# Altium PCB mchf_pro_rf.PcbDoc (part 1 of 3)
Units mil, origin at the board's own origin, x right, y up, seen from the top; angles counter-clockwise.
Board outline 7874.02 x 5512.23 mil, 2 copper layers (Top Layer, Bottom Layer); 347 components, 225 nets, 1009 pads, 443 vias.
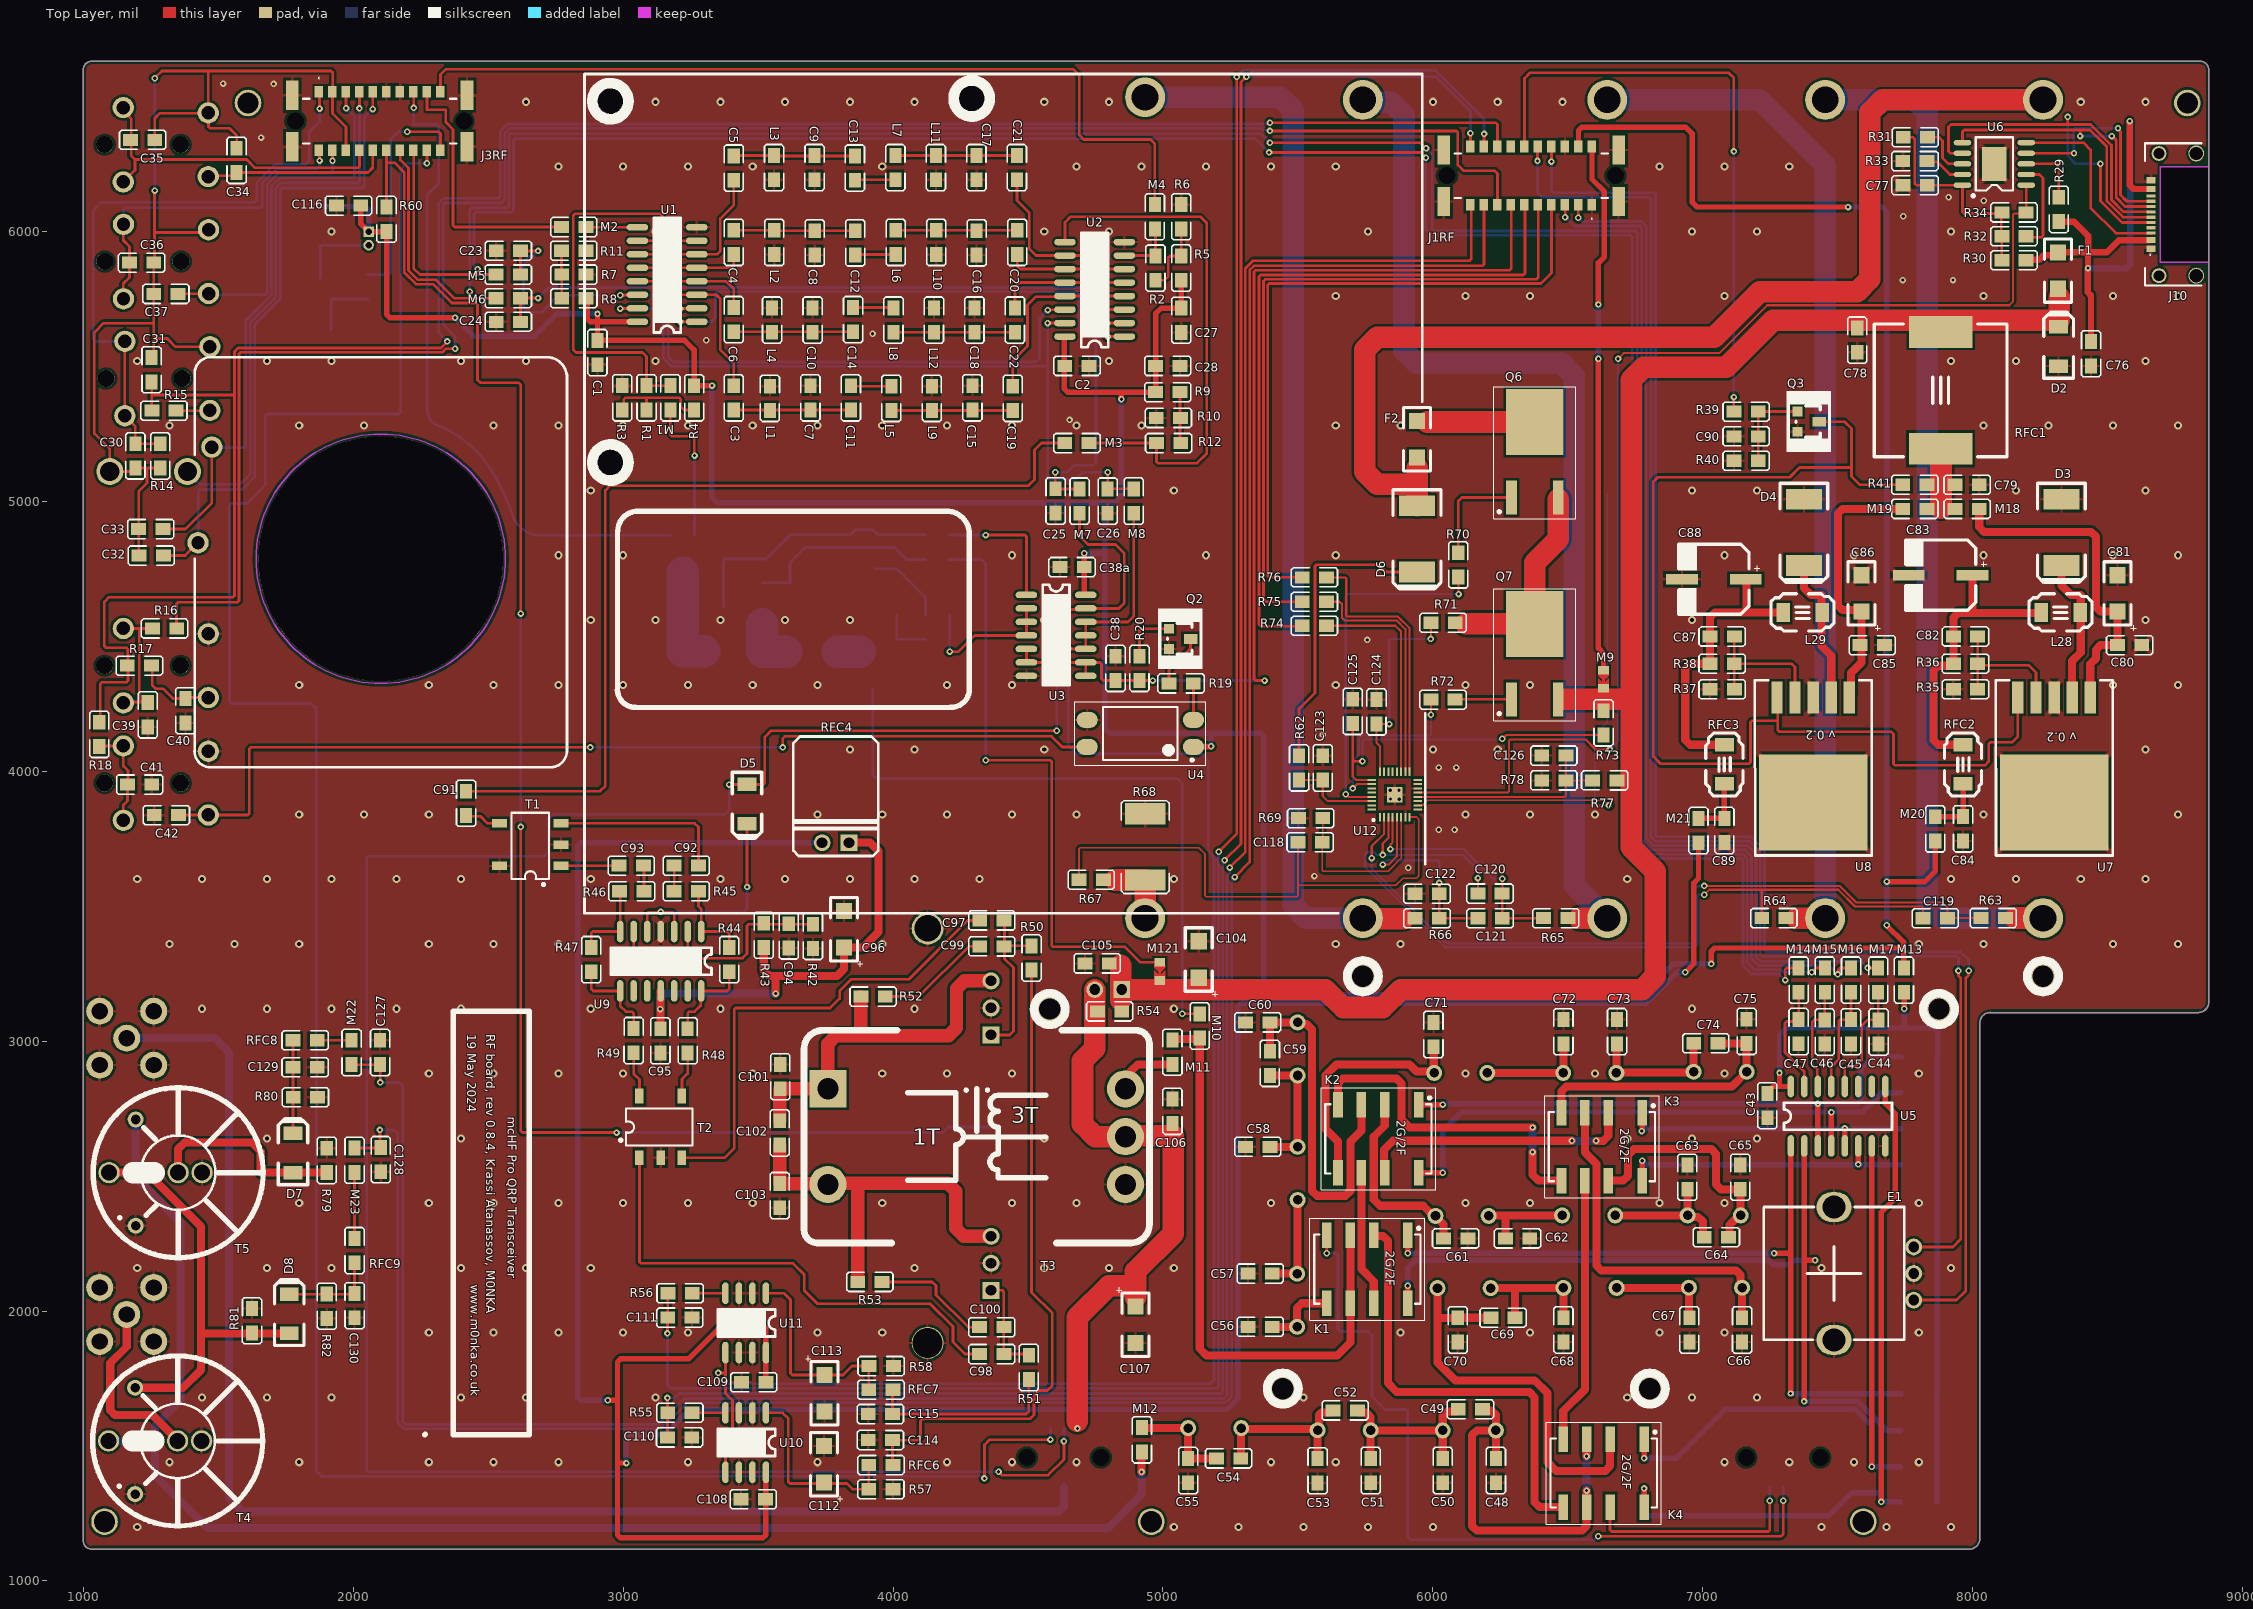
[diagram p0: Top Layer view]
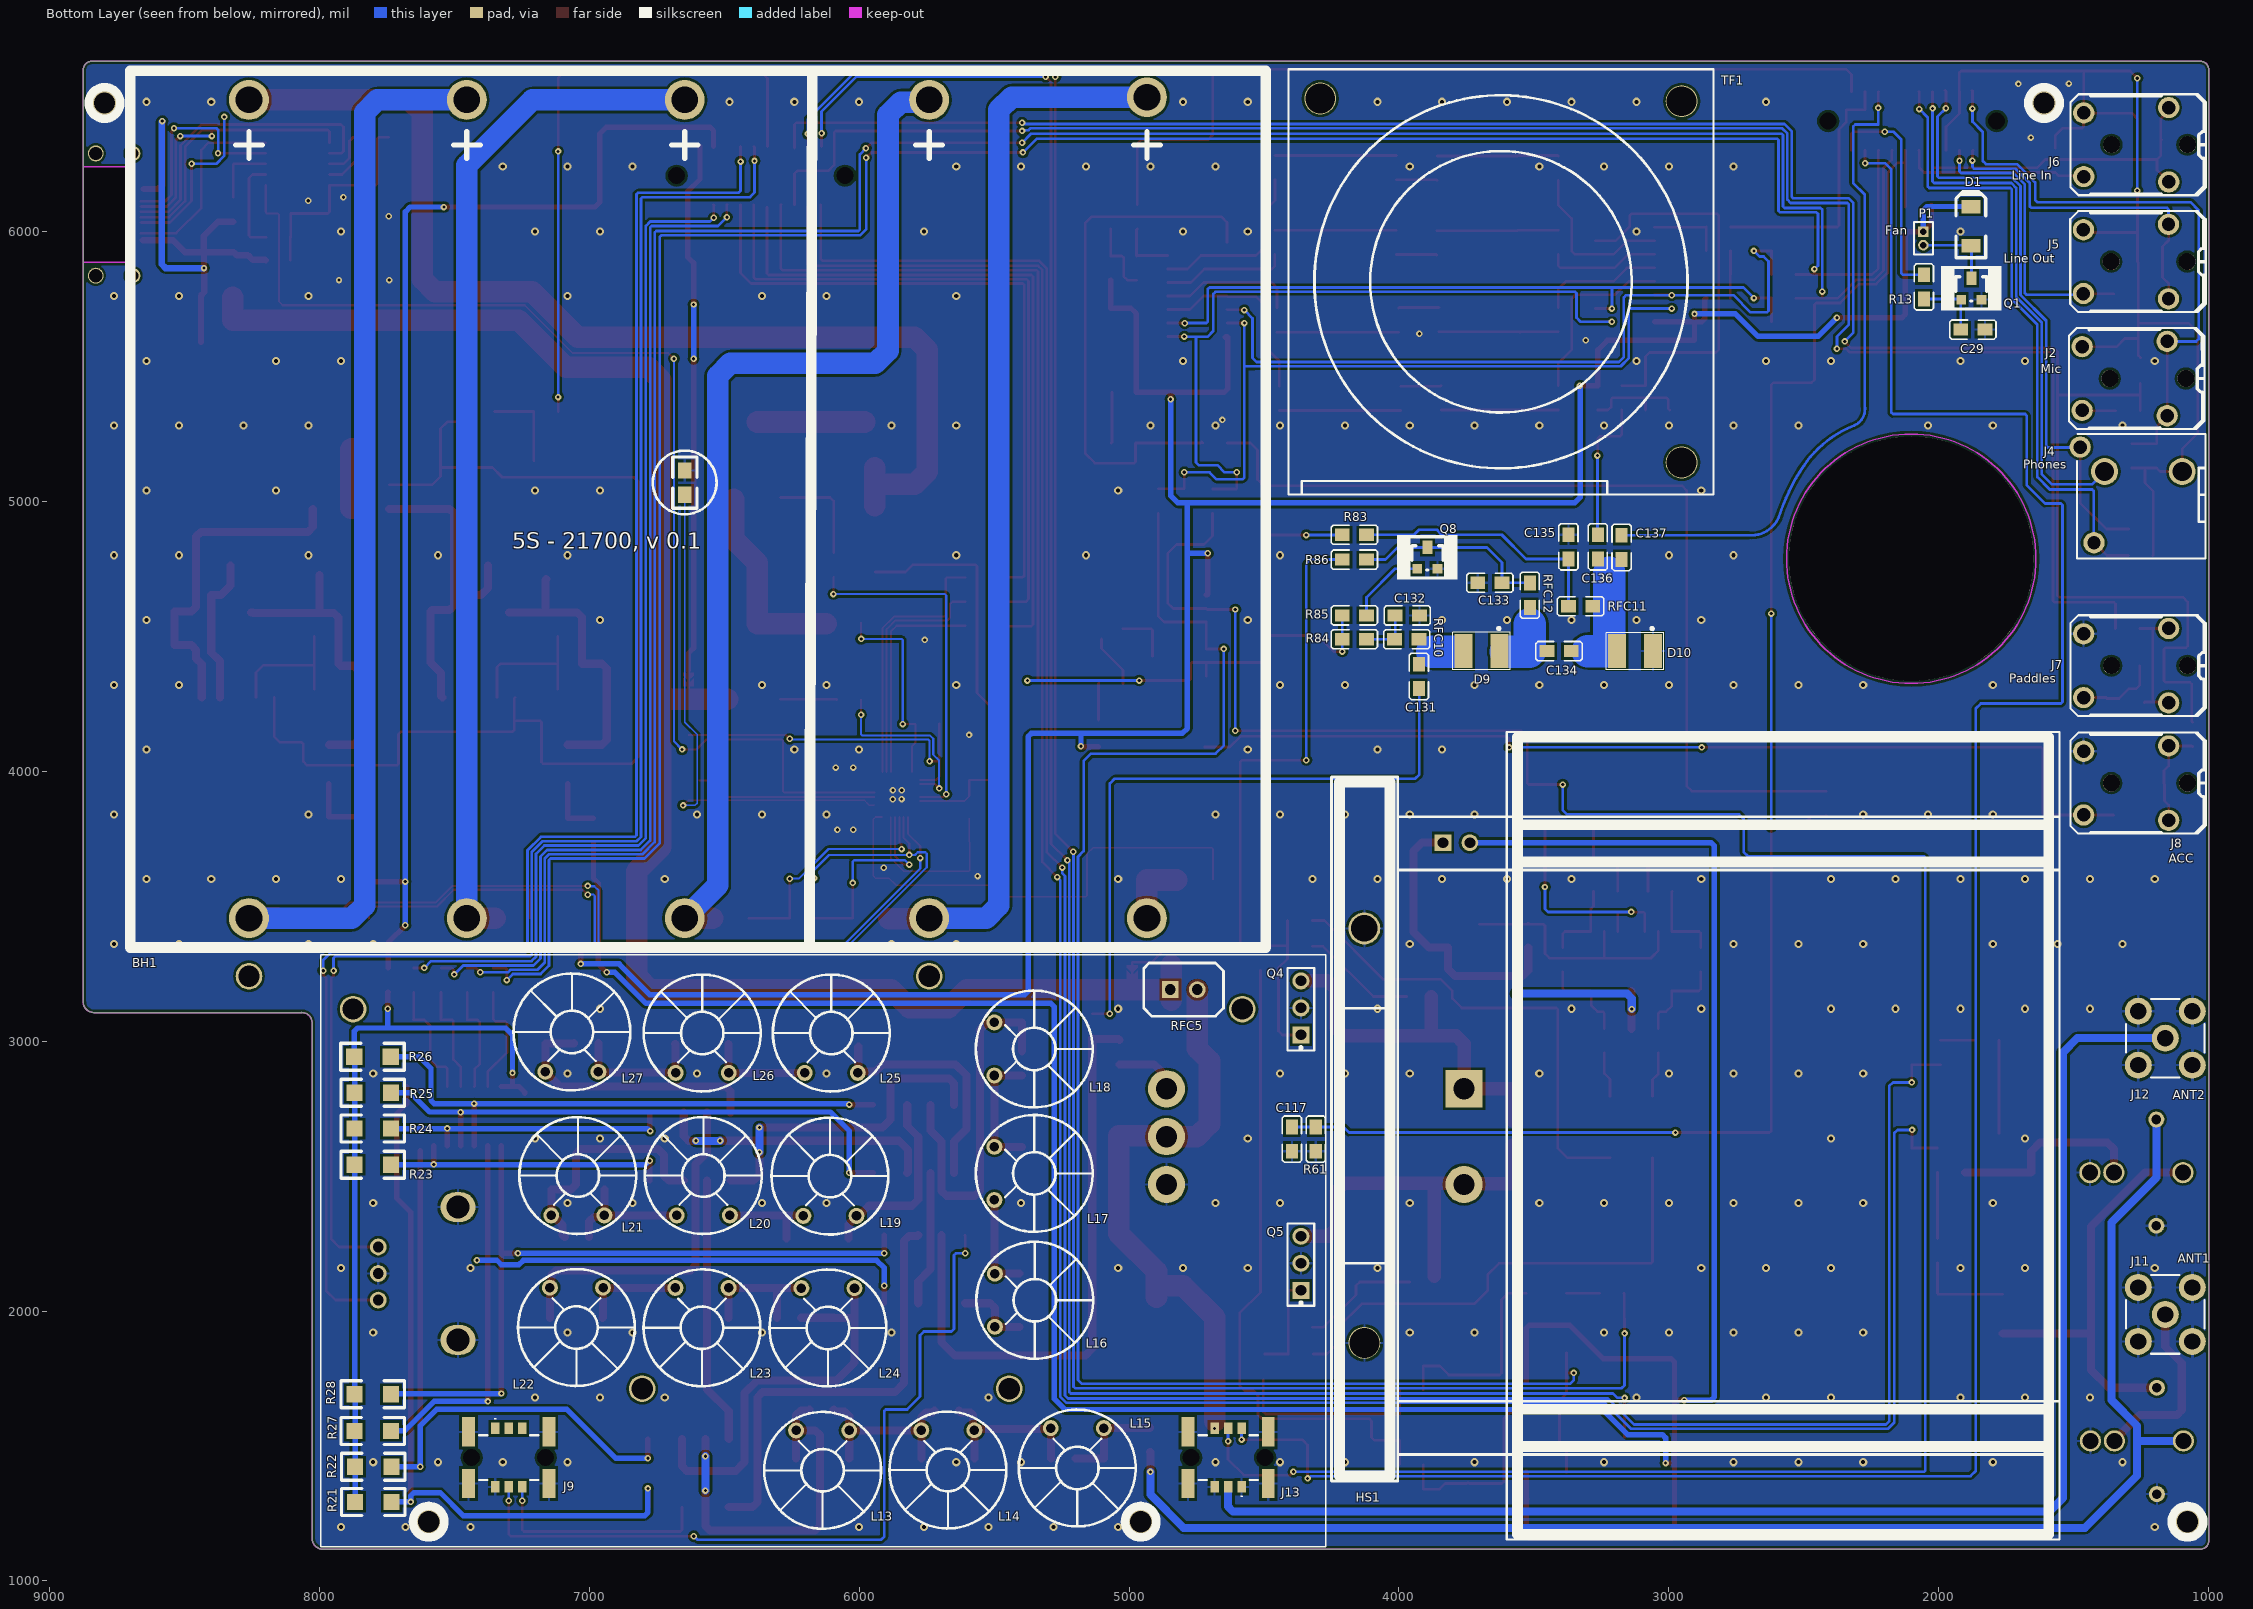
[diagram p1: Bottom Layer view, seen from below]

## Layer stack, top to bottom
Top Solder: solder mask 0.4, Solder Resist, Dk 3.5
Top Layer: signal copper 1.4
Dielectric 1: dielectric 12.6, FR-4, Dk 4.8
Bottom Layer: signal copper 1.4
Bottom Solder: solder mask 0.4, Solder Resist, Dk 3.5

## Board outline
1031.03,1117.97 cw(c1031.03,1149) 1000,1149 1000,6599 cw(c1031.03,6599) 1031.03,6630.03 8842.98,6630.03 cw(c8842.98,6599) 8874.02,6599 8874.01,3144.19 8873.96,3144.19 cw(c8835.09,3144.68) 8834.59,3105.81 8834.85,3105.89 8064.8,3105.89 8065.29,3106.11 ccw(c8064.8,3067.67) 8026.36,3068.16 8026.36,3068.7 8026.36,1157.23 8025.96,1156.19 cw(c7987.09,1156.68) 7986.59,1117.81 7986.59,1118

## Design rules (kind name [scope] priority, off if disabled: settings)
Clearance Clearance_1 [InPolygon] p1: gap=9 ignorepadtopadclearanceinfootprint=FALSE except(0: Arc-Hole Track-Hole SMDPad-Hole THPad-Hole Via-Hole Fill-Hole Poly-Hole Region-Hole Text-Hole)
Clearance [All] p2: gap=6 ignorepadtopadclearanceinfootprint=FALSE except(0: Arc-Hole Track-Hole SMDPad-Hole THPad-Hole Via-Hole Fill-Hole Poly-Hole Region-Hole Text-Hole)
DiffPairsRouting [All] p1: maxlimit=300 minlimit=6 mostfreqgap=6 toplayer_minwidth=6 toplayer_maxwidth=6 toplayer_prefwidth=6 bottomlayer_minwidth=6 bottomlayer_maxwidth=6 bottomlayer_prefwidth=6 maxuncoupledlength=150
HoleSize [All] p1: absolutevalues=TRUE maxlimit=1000 minlimit=1 maxpercent=80.000 minpercent=20.000
PolygonConnect PolygonConnect_vias [IsVia] p1: connectstyle=Direct reliefconductorwidth=10 reliefentries=4 polygonreliefangle="90 Angle" airgapwidth=10
PolygonConnect PolygonConnect_J1 [InComponent('J1')] p2: connectstyle=Relief reliefconductorwidth=50 reliefentries=4 polygonreliefangle="90 Angle" airgapwidth=10
PolygonConnect PolygonConnect_AluCap [InComponent('C74') OR InComponent('C77') OR InComponent('C80') OR InComponent('C83') OR InComponent('C86') OR InComponent('C89') OR InComponent('C147') OR InComponent('C150') OR InComponent('U6')  OR InComponent('U7') OR InComponent('U8') OR InComponent('U9')] p3: connectstyle=Relief reliefconductorwidth=20 reliefentries=4 polygonreliefangle="45 Angle" airgapwidth=10
PolygonConnect PolygonConnect_P2 [InComponent('P2')] p4: connectstyle=Relief reliefconductorwidth=30 reliefentries=4 polygonreliefangle="90 Angle" airgapwidth=10
PolygonConnect [All] p5: connectstyle=Relief reliefconductorwidth=10 reliefentries=4 polygonreliefangle="90 Angle" airgapwidth=10
RoomDefinition "Bandpass filters" [InComponentClass('Bandpass filters')] p1: confinementstyle=ConfineIn formatcopy=TRUE lockcomponents=FALSE outline 5173,4854 5173,6414 2414.01,6414 2414.01,4854
RoomDefinition "RX TAP" [InComponentClass('RX TAP')] p2: confinementstyle=ConfineIn formatcopy=TRUE lockcomponents=FALSE outline 2983,4244 4279.22,4244 4279.22,4960 2983,4960
RoomDefinition "SWR/Power meter" [InComponentClass('SWR/Power meter')] p3: confinementstyle=ConfineOut formatcopy=TRUE lockcomponents=FALSE outline 2756,7017 2756,7522 1618,7522 1618,7017
RoomDefinition SMPS [InComponentClass('SMPS')] p4: confinementstyle=ConfineOut formatcopy=TRUE lockcomponents=FALSE outline 1035,7549 1580,7549 1580,7876 1035,7876
RoomDefinition BMS [InComponentClass('BMS')] p5: confinementstyle=ConfineOut formatcopy=TRUE lockcomponents=FALSE outline 1617,7549 2755,7549 2755,7876 1617,7876
RoomDefinition "Lowpass filters" [InComponentClass('Lowpass filters')] p6: confinementstyle=ConfineOut formatcopy=TRUE lockcomponents=FALSE outline 3395,7910 4172,7910 4172,8221 3395,8221
RoomDefinition "TX PA" [InComponentClass('TX PA')] p7: confinementstyle=ConfineOut formatcopy=TRUE lockcomponents=FALSE outline 1036,7009 1579,7009 1579,7525 1036,7525
RoomDefinition 160m [InComponentClass('160m')] p8: confinementstyle=ConfineOut formatcopy=TRUE lockcomponents=FALSE outline 3345,7548 3345,7878 2796,7878 2796,7548
RoomDefinition 80m [InComponentClass('80m')] p9: confinementstyle=ConfineOut formatcopy=TRUE lockcomponents=FALSE outline 3341,7907 3341,8219 2797,8219 2797,7907
RoomDefinition 60/40m [InComponentClass('60/40m')] p10: confinementstyle=ConfineOut formatcopy=TRUE lockcomponents=FALSE outline 3343,7013 3343,7517 2795,7517 2795,7013
RoomDefinition 30/20m [InComponentClass('30/20m')] p11: confinementstyle=ConfineOut formatcopy=TRUE lockcomponents=FALSE outline 2758,7903 2758,8215 2278,8215 2278,7903
RoomDefinition 17-10m [InComponentClass('17-10m')] p12: confinementstyle=ConfineOut formatcopy=TRUE lockcomponents=FALSE outline 2257,7902 2257,8215 1620,8215 1620,7902
RoomDefinition "UI board interface" [InComponentClass('UI board interface')] p13: confinementstyle=ConfineOut formatcopy=TRUE lockcomponents=FALSE outline 4171,7013 4171,7875 3389,7875 3389,7013
RoutingVias [All] p1: holewidth=15 width=30 viastyle="Through Hole" minholewidth=28 minwidth=50 maxholewidth=28 maxwidth=50
SilkToSolderMaskClearance SilkscreenOverComponentPads [IsPad] p1: minsilkscreentomaskgap=10 clearancetoexposedcopper=TRUE
SolderMaskExpansion SolderMaskExpansion_1 [IsVia] p1: expansion=-15 istentingtop=FALSE
SolderMaskExpansion [All] p2: expansion=4 istentingtop=FALSE
Width "Schematic Width Constraint_86" [InNet('SRN')] p1: maxlimit=6 minlimit=6 preferedwidth=6
Width "Schematic Width Constraint_85" [InNet('NetBH1_12')] p2: maxlimit=6 minlimit=6 preferedwidth=6
Width "Schematic Width Constraint_56" [InNet('SRP')] p3: maxlimit=6 minlimit=6 preferedwidth=6
Width "Schematic Width Constraint_82" [InNet('NetJ12_1')] p4: maxlimit=30 minlimit=30 preferedwidth=30
Width "Schematic Width Constraint_80" [InNet('NetJ1RF_A11')] p5: maxlimit=80 minlimit=20 preferedwidth=20
Width "Schematic Width Constraint_78" [InNet('NetR74_1')] p6: maxlimit=8 minlimit=8 preferedwidth=8
Width "Schematic Width Constraint_77" [InNet('NetR34_1')] p7: maxlimit=8 minlimit=8 preferedwidth=8
Width "Schematic Width Constraint_76" [InNet('NetC119_2')] p8: maxlimit=8 minlimit=8 preferedwidth=8
Width "Schematic Width Constraint_72" [InNet('NetR70_1')] p9: maxlimit=8 minlimit=8 preferedwidth=8
Width "Schematic Width Constraint_71" [InNet('NetR72_1')] p10: maxlimit=8 minlimit=8 preferedwidth=8
Width "Schematic Width Constraint_70" [InNet('NetR76_1')] p11: maxlimit=8 minlimit=8 preferedwidth=8
Width "Schematic Width Constraint_69" [InNet('NetC120_2')] p12: maxlimit=8 minlimit=8 preferedwidth=8
Width "Schematic Width Constraint_67" [InNet('NetC124_2')] p13: maxlimit=8 minlimit=8 preferedwidth=8
Width "Schematic Width Constraint_66" [InNet('NetC126_1')] p14: maxlimit=8 minlimit=8 preferedwidth=8
Width "Schematic Width Constraint_64" [InNet('NetC119_1')] p15: maxlimit=8 minlimit=8 preferedwidth=8
Width "Schematic Width Constraint_58" [InNet('NetC121_2')] p16: maxlimit=8 minlimit=8 preferedwidth=8
Width "Schematic Width Constraint_57" [InNet('NetC125_1')] p17: maxlimit=8 minlimit=8 preferedwidth=8
Width "Schematic Width Constraint_55" [InNet('NetC123_2')] p18: maxlimit=8 minlimit=8 preferedwidth=8
Width "Schematic Width Constraint_48" [InNet('NetR75_1')] p19: maxlimit=8 minlimit=8 preferedwidth=8
Width "Schematic Width Constraint_46" [InNet('NetF2_2')] p20: maxlimit=80 minlimit=80 preferedwidth=80
Width "Schematic Width Constraint_3" [InNet('NetQ6_3')] p21: maxlimit=80 minlimit=80 preferedwidth=80
Width "Schematic Width Constraint_49" [InNet('NetC79_2')] p22: maxlimit=80 minlimit=80 preferedwidth=80
Width "Schematic Width Constraint_44" [InNet('NetC76_2')] p23: maxlimit=24 minlimit=24 preferedwidth=24
Width "Schematic Width Constraint_9" [InNet('NetBH1_2')] p24: maxlimit=80 minlimit=80 preferedwidth=80
Width "Schematic Width Constraint_54" [InNet('NetC134_1')] p25: maxlimit=120 minlimit=120 preferedwidth=120
Width "Schematic Width Constraint_53" [InNet('NetC134_2')] p26: maxlimit=120 minlimit=120 preferedwidth=120
Width "Schematic Width Constraint_52" [InNet('NetC131_1')] p27: maxlimit=120 minlimit=120 preferedwidth=120
Width "Schematic Width Constraint_47" [InNet('NetD7_1')] p28: maxlimit=30 minlimit=30 preferedwidth=30
Width "Schematic Width Constraint_41" [InNet('NetJ11_1')] p29: maxlimit=30 minlimit=30 preferedwidth=30
Width "Schematic Width Constraint_12" [InNet('NetD8_1')] p30: maxlimit=30 minlimit=30 preferedwidth=30
Width "Schematic Width Constraint_8" [InNet('GND')] p31: maxlimit=30 minlimit=30 preferedwidth=30
Width "Schematic Width Constraint_4" [InNet('NetM12_2')] p32: maxlimit=30 minlimit=30 preferedwidth=30
Width "Schematic Width Constraint_73" [InNet('NetC43_1')] p33: maxlimit=20 minlimit=20 preferedwidth=20
Width "Schematic Width Constraint_65" [InNet('NetBH1_10')] p34: maxlimit=80 minlimit=80 preferedwidth=80
Width "Schematic Width Constraint_75" [InNet('PACK_P')] p35: maxlimit=80 minlimit=80 preferedwidth=80
Width "Schematic Width Constraint_51" [InNet('VCC_8V')] p36: maxlimit=20 minlimit=20 preferedwidth=20
Width "Schematic Width Constraint_40" [InNet('VCC_5V')] p37: maxlimit=20 minlimit=20 preferedwidth=20
Width "Schematic Width Constraint_93" [InNet('NetC80_1')] p38: maxlimit=30 minlimit=30 preferedwidth=30
Width "Schematic Width Constraint_89" [InNet('NetC85_1')] p39: maxlimit=30 minlimit=30 preferedwidth=30
Width "Schematic Width Constraint_88" [InNet('NetC89_1')] p40: maxlimit=20 minlimit=20 preferedwidth=20
Width "Schematic Width Constraint_79" [InNet('TRX_20V')] p41: maxlimit=80 minlimit=80 preferedwidth=80
Width "Schematic Width Constraint_84" [InNet('NetC102_2')] p42: maxlimit=50 minlimit=50 preferedwidth=50
Width "Schematic Width Constraint_83" [InNet('NetC101_2')] p43: maxlimit=50 minlimit=50 preferedwidth=50
Width "Schematic Width Constraint_81" [InNet('NetC95_2')] p44: maxlimit=30 minlimit=30 preferedwidth=30
Width "Schematic Width Constraint_68" [InNet('NetBH1_1')] p45: maxlimit=80 minlimit=80 preferedwidth=80
Width "Schematic Width Constraint_63" [InNet('NetC87_2')] p46: maxlimit=30 minlimit=30 preferedwidth=30
Width "Schematic Width Constraint_62" [InNet('NetD4_2')] p47: maxlimit=30 minlimit=30 preferedwidth=30
Width "Schematic Width Constraint_61" [InNet('NetC82_2')] p48: maxlimit=30 minlimit=30 preferedwidth=30
Width "Schematic Width Constraint_60" [InNet('NetD3_2')] p49: maxlimit=30 minlimit=30 preferedwidth=30
Width "Schematic Width Constraint_50" [InNet('NetC84_1')] p50: maxlimit=20 minlimit=20 preferedwidth=20
Width "Schematic Width Constraint_45" [InNet('NetBH1_4')] p51: maxlimit=80 minlimit=80 preferedwidth=80
Width "Schematic Width Constraint_43" [InNet('NetBH1_8')] p52: maxlimit=80 minlimit=80 preferedwidth=80
Width "Schematic Width Constraint_42" [InNet('NetBH1_6')] p53: maxlimit=80 minlimit=80 preferedwidth=80
Width "Schematic Width Constraint_39" [InNet('K3A')] p54: maxlimit=20 minlimit=20 preferedwidth=20
Width "Schematic Width Constraint_37" [InNet('K4K')] p55: maxlimit=20 minlimit=20 preferedwidth=20
Width "Schematic Width Constraint_36" [InNet('K2A')] p56: maxlimit=20 minlimit=20 preferedwidth=20
Width "Schematic Width Constraint_35" [InNet('K4A')] p57: maxlimit=20 minlimit=20 preferedwidth=20
Width "Schematic Width Constraint_27" [InNet('K2K')] p58: maxlimit=20 minlimit=20 preferedwidth=20
Width "Schematic Width Constraint_21" [InNet('K1K')] p59: maxlimit=20 minlimit=20 preferedwidth=20
Width "Schematic Width Constraint_13" [InNet('K3K')] p60: maxlimit=20 minlimit=20 preferedwidth=20
Width "Schematic Width Constraint_2" [InNet('K1A')] p61: maxlimit=20 minlimit=20 preferedwidth=20
Width "Schematic Width Constraint_38" [InNet('NetM11_2')] p62: maxlimit=30 minlimit=30 preferedwidth=30
Width "Schematic Width Constraint_34" [InNet('NetK1_3')] p63: maxlimit=30 minlimit=30 preferedwidth=30
Width "Schematic Width Constraint_33" [InNet('NetK1_7')] p64: maxlimit=30 minlimit=30 preferedwidth=30
Width "Schematic Width Constraint_32" [InNet('NetK2_4')] p65: maxlimit=30 minlimit=30 preferedwidth=30
Width "Schematic Width Constraint_31" [InNet('NetK2_7')] p66: maxlimit=30 minlimit=30 preferedwidth=30
Width "Schematic Width Constraint_1" [InNet('NetK1_2')] p67: maxlimit=30 minlimit=30 preferedwidth=30
Width "Schematic Width Constraint" [InNet('NetK3_6')] p68: maxlimit=30 minlimit=30 preferedwidth=30
Width "Schematic Width Constraint_30" [InNet('NetC73_1')] p69: maxlimit=30 minlimit=30 preferedwidth=30
Width "Schematic Width Constraint_29" [InNet('NetC64_1')] p70: maxlimit=30 minlimit=30 preferedwidth=30
Width "Schematic Width Constraint_28" [InNet('NetC61_2')] p71: maxlimit=30 minlimit=30 preferedwidth=30
Width "Schematic Width Constraint_26" [InNet('NetC63_2')] p72: maxlimit=30 minlimit=30 preferedwidth=30
Width "Schematic Width Constraint_25" [InNet('NetC67_1')] p73: maxlimit=30 minlimit=30 preferedwidth=30
Width "Schematic Width Constraint_24" [InNet('NetC72_1')] p74: maxlimit=30 minlimit=30 preferedwidth=30
Width "Schematic Width Constraint_23" [InNet('NetC69_1')] p75: maxlimit=30 minlimit=30 preferedwidth=30
Width "Schematic Width Constraint_22" [InNet('NetC57_2')] p76: maxlimit=30 minlimit=30 preferedwidth=30
Width "Schematic Width Constraint_20" [InNet('NetC62_2')] p77: maxlimit=30 minlimit=30 preferedwidth=30
Width "Schematic Width Constraint_19" [InNet('NetC58_2')] p78: maxlimit=30 minlimit=30 preferedwidth=30
Width "Schematic Width Constraint_18" [InNet('NetC59_1')] p79: maxlimit=30 minlimit=30 preferedwidth=30
Width "Schematic Width Constraint_17" [InNet('NetC68_1')] p80: maxlimit=30 minlimit=30 preferedwidth=30
Width "Schematic Width Constraint_16" [InNet('NetC74_1')] p81: maxlimit=30 minlimit=30 preferedwidth=30
Width "Schematic Width Constraint_15" [InNet('NetC71_1')] p82: maxlimit=30 minlimit=30 preferedwidth=30
Width "Schematic Width Constraint_14" [InNet('NetC56_2')] p83: maxlimit=30 minlimit=30 preferedwidth=30
Width "Schematic Width Constraint_11" [InNet('NetC54_1')] p84: maxlimit=30 minlimit=30 preferedwidth=30
Width "Schematic Width Constraint_10" [InNet('NetC52_1')] p85: maxlimit=30 minlimit=30 preferedwidth=30
Width "Schematic Width Constraint_7" [InNet('NetC66_1')] p86: maxlimit=30 minlimit=30 preferedwidth=30
Width "Schematic Width Constraint_6" [InNet('NetC48_2')] p87: maxlimit=30 minlimit=30 preferedwidth=30
Width "Schematic Width Constraint_5" [InNet('NetC49_1')] p88: maxlimit=30 minlimit=30 preferedwidth=30
Width Width_PIN [(InNet('NetC78_1'))OR(InNet('NetC81_2'))] p89: maxlimit=125 minlimit=125 preferedwidth=125
Width [All] p90: maxlimit=10 minlimit=10 preferedwidth=10
27 further rules are at their usual default settings.

## Classes and differential pairs
component class "SWR/Power meter": C127 C128 C129 C130 D7 D8 J11 J12 J13 M22 M23 R79 R80 R81 R82 RFC8 RFC9 T4 T5
component class "RX TAP": C131 C132 C133 C134 C135 C136 C137 D9 D10 Q8 R83 R84 R85 R86 RFC10 RFC11 RFC12
component class SMPS: C76 C77 C78 C79 C80 C81 C82 C83 C84 C85 C86 C87 C88 C89 C90 D2 D3 D4 F1 J10 L28 L29 M18 M19 M20 M21 Q3 R29 R30 R31 R32 R33 R34 R35 R36 R37 R38 R39 R40 R41 RFC1 RFC2 RFC3 U6 U7 U8
component class BMS: BH1 C118 C119 C120 C121 C122 C123 C124 C125 C126 D6 F2 Q6 Q7 R62 R63 R64 R65 R66 R67 R68 R69 R70 R71 R72 R73 R74 R75 R76 R77 R78 U12
component class 160m: C71 C72 C73 C74 C75 L25 L26 L27
component class 80m: C66 C67 C68 C69 C70 L22 L23 L24
component class 60/40m: C61 C62 C63 C64 C65 L19 L20 L21
component class 30/20m: C56 C57 C58 C59 C60 L16 L17 L18
component class 17-10m: C48 C49 C50 C51 C52 C53 C54 C55 L13 L14 L15
component class "UI board interface": C29 C30 C31 C32 C33 C34 C35 C36 C37 C38 C38a C39 C40 C41 C42 D1 E1 J1RF J2 J3RF J4 J5 J6 J7 J8 M9 P1 Q1 Q2 R13 R14 R15 R16 R17 R18 R19 R20 TF1 U3 U4
component class "TX PA": C91 C92 C93 C94 C95 C96 C97 C98 C99 C100 C101 C102 C103 C104 C105 C106 C107 C108 C109 C110 C111 C112 C113 C114 C115 C116 C117 D5 HS1 M121 Q4 Q5 R42 R43 R44 R45 R46 R47 R48 R49 R50 R51 R52 R53 R54 R55 R56 R57 R58 R60 R61 RFC4 RFC5 RFC6 RFC7 T1 T2 T3 U9 U10 U11
component class "Lowpass filters": C43 C44 C45 C46 C47 C63b J9 K1 K2 K3 K4 M10 M11 M12 M13 M14 M15 M16 M17 R21 R22 R23 R24 R25 R26 R27 R28 U5
component class "Bandpass filters": C1 C2 C3 C4 C5 C6 C7 C8 C9 C10 C11 C12 C13 C14 C15 C16 C17 C18 C19 C20 C21 C22 C23 C24 C25 C26 C27 C28 L1 L2 L3 L4 L5 L6 L7 L8 L9 L10 L11 L12 M1 M2 M3 M4 M5 M6 M7 M8 R1 R2 R3 R4 R5 R6 R7 R8 R9 R10 R11 R12 U1 U2

## Components (designator, comment, footprint, x,y, rotation, side; value= is the part's Value field where it differs from the comment)
BH1 "LiOn 5S 21700" BATT_HOLDER_5S 7138.13,5069.68 r180 bottom locked
C1 "100nF" 0805 2904.78,5596.86 r270 top
C2 "100nF" 0805 4635.39,5501.39 r0 top
C3 "100nF" 0805 3410.14,5337.14 r90 top
C4 "100nF" 0805 3409.78,6005.18 r270 top
C5 "100nF" 0805 3409.78,6280.14 r270 top
C6 "100nF" 0805 3409.78,5627.14 r90 top
C7 "1.5nF" 0805 3694.14,5337.14 r90 top
C8 "820pF" 0805 3709.42,6003.14 r270 top
C9 "390pF" 0805 3709.14,6190.14 r90 top
C10 "180pF" 0805 3701.42,5717.14 r270 top
C11 "680pF" 0805 3844.14,5337.14 r90 top
C12 "390pF" 0805 3859.42,6003.14 r270 top
C13 "180pF" 0805 3858.42,6280.14 r270 top
C14 "82pF" 0805 3852.14,5627.14 r90 top
C15 "1.5nF" 0805 4294.14,5337.14 r90 top
C16 "820pF" 0805 4309.42,6003.14 r270 top
C17 "390pF" 0805 4309.14,6190.14 r90 top
C18 "180pF" 0805 4301.42,5717.14 r270 top
C19 "100nF" 0805 4443.42,5427.14 r270 top
C20 "100nF" 0805 4460.14,5913.14 r90 top
C21 "100nF" 0805 4459.14,6190.14 r90 top
C22 "100nF" 0805 4451.42,5717.14 r270 top
C23 "100nF" 0805 2620.76,5928.43 r180 top
C24 "100nF" 0805 2620.76,5665 r180 top
C25 "100nF" 0805 4601.88,5047.04 r270 top
C26 "100nF" 0805 4794.78,5046.71 r270 top
C27 "100nF" 0805 5067.64,5716.6 r270 top
C28 "100nF" 0805 4971.78,5501.39 r0 top
C29 "1nF" 0805 1919.53,5635.7 r180 bottom
C30 "1nF" 0805 1193.22,5122.14 r90 top
C31 "1nF" 0805 1253.22,5441.14 r90 top
C32 "1nF" 0805 1297.86,4799.22 r180 top
C33 "1nF" 0805 1204.14,4896.78 r0 top
C34 "1nF" 0805 1567.78,6308.86 r270 top
C35 "1nF" 0805 1265.86,6339.22 r180 top
C36 "1nF" 0805 1261.86,5884.22 r180 top
C37 "1nF" 0805 1260.14,5767.78 r0 top
C38 "100nF" 0805 4824.22,4334.99 r90 top
C38a "100nF" 0805 4708.86,4756.22 r180 top
C39 "1nF" 0805 1238.78,4254.86 r270 top
C40 "1nF" 0805 1378.73,4178.14 r90 top
C41 "1nF" 0805 1163.01,3950.42 r0 top
C42 "1nF" 0805 1262.07,3836.89 r0 top
C43 "100nF" 0805 7238.78,2806.86 r270 top
C44 "100nF" 0805 7651.18,2987.96 r90 top
C45 "100nF" 0805 7549,2988.81 r90 top
C46 "100nF" 0805 7452,2987.96 r90 top
C47 "100nF" 0805 7354.91,2989.67 r90 top
C48 "47pF" 0805 6233.43,1363.32 r90 top
C49 "18pF" 0805 6093.14,1635.78 r0 top
C50 "100pF" 0805 6036.8,1363.32 r90 top
C51 "10pF" 0805 5769.65,1363.32 r90 top
C52 "100pF" 0805 5629.14,1631.78 r0 top
C53 "100pF" 0805 5572.8,1362.47 r90 top
C54 "100pF" 0805 5197.14,1453.96 r0 top
C55 "2pF" 0805 5093.37,1363.32 r90 top
C56 "180pF" 0805 5314.14,1941.35 r0 top
C57 "390pF" 0805 5314.14,2138.78 r0 top
C58 "390pF" 0805 5305.13,2608.2 r0 top
C59 "100pF" 0805 5395.76,2963.43 r270 top
C60 "180pF" 0805 5305.13,3069.2 r0 top
C61 "270pF" 0805 6130.25,2269.22 r180 top
C62 "680pF" 0805 6359.53,2269.22 r180 top
C63 "680pF" 0805 6942.33,2541.86 r270 top
C64 "180pF" 0805 7096,2273.8 r180 top
C65 "270pF" 0805 7138.37,2541.86 r270 top
C66 "470pF" 0805 7145.19,1975.86 r270 top
C67 "1.2nF" 0805 6949.76,1975.86 r270 top
C68 "1.2nF" 0805 6483.35,1975.86 r270 top
C69 "220pF" 0805 6213.83,1975 r0 top
C70 "470pF" 0805 6091.78,1975.86 r270 top
C71 "820pF" 0805 6001.92,2978.57 r90 top
C72 "2.2nF" 0805 6483.57,2988.81 r90 top
C73 "2.2nF" 0805 6682.22,2989.14 r90 top
C74 "390pF" 0805 7056.86,2992.22 r180 top
C75 "820pF" 0805 7162.43,2990 r90 top
C76 "100nF" 0805 8438.21,5500.54 r90 top
C77 "100nF" 0805 7832.03,6171.11 r180 top
C78 "100nF" 0805 7572.14,5551 r90 top
C79 "100nF" 0805 8024.86,5061.22 r180 top
C80 "100nF" 0805 8535.14,4466.78 r0 top
C81 "22uF" 1206_Elec_Cap 8536.08,4590.37 r90 top
C82 "DNI" 0805 8018.86,4499.22 r180 top
C83 "220uF" CAP_ALUM_Pro 7881,4726.22 r180 top locked
C84 "100nF" 0805 7963.77,3832.42 r270 top
C85 "100nF" 0805 7581.54,4466.78 r0 top
C86 "22uF" 1206_Elec_Cap 7588.09,4590.37 r90 top
C87 "DNI" 0805 7117.53,4499.22 r180 top
C88 "220uF" CAP_ALUM_Pro 7040.8,4711 r180 top locked
C89 "100nF" 0805 7079.56,3826.18 r270 top
C90 "100nF" 0805 7206.18,5240.77 r180 top
C91 "100nF" 0805 2418.22,3835.14 r90 top
C92 "100nF" 0805 3279.86,3650.22 r180 top
C93 "100nF" 0805 2984.14,3649.78 r0 top
C94 "100nF" 0805 3614,3344 r90 top
C95 "100nF" 0805 3138.22,2955.14 r90 top
C96 "22uF" 1206_Elec_Cap 3818.31,3346 r90 top
C97 "100nF" 0805 4411.86,3447.22 r180 top
C98 "100nF" 0805 4411.46,1841 r180 top
C99 "10nF" 0805 4411.86,3351.22 r180 top
C100 "10nF" 0805 4411.46,1940.57 r180 top
C101 "560pF" 0805 3581.78,2914.19 r270 top
C102 "330pF" 0805 3579.78,2705.86 r270 top
C103 "560pF" 0805 3579.78,2473.86 r270 top
C104 "10uF" 1206_Elec_Cap 5132.72,3234.14 r90 top
C105 "100nF" 0805 4710.14,3287.78 r0 top
C106 "100nF" 0805 5034.78,2785.86 r270 top
C107 "22uF" 1206_Elec_Cap 4897.78,2017.86 r270 top
C108 "100nF" 0805 3527.86,1303.22 r180 top
C109 "100nF" 0805 3529.86,1736.22 r180 top
C110 "100nF" 0805 3163.14,1531.78 r0 top
C111 "100nF" 0805 3256,1976 r180 top
C112 "22uF" 1206_Elec_Cap 3744.22,1364.14 r90 top
C113 "22uF" 1206_Elec_Cap 3745.78,1764.18 r270 top
C114 "100nF" 0805 3907.14,1522.1 r0 top
C115 "100nF" 0805 3907.14,1618.1 r0 top
C116 "100nF" 0805 1936.9,6095 r0 top
C117 "100nF" 0805 4396.65,2682.86 r270 bottom
C118 "100nF" 0805 5590.86,3737.22 r180 top
C119 "100nF" 0805 7907,3455.5 r180 top
C120 "100nF" 0805 6165.55,3546.35 r0 top
C121 "100nF" 0805 6257.59,3455.28 r180 top
C122 "100nF" 0805 6024.09,3546.35 r180 top
C123 "100pF" 0805 5591.78,4057.86 r270 top
C124 "100pF" 0805 5790.78,4265.86 r270 top
C125 "100nF" 0805 5703.22,4175.62 r90 top
C126 "100nF" 0805 6494.03,4057.86 r180 top
C127 "100nF" 0805 2099.48,3003.86 r270 top
C128 "100nF" 0805 2101.78,2606.86 r270 top
C129 "2.2uF" 0805 1867.86,2903.22 r180 top
C130 "2.2uF" 0805 2004.78,2065.86 r270 top
C131 "1nF" 0805 3926.22,4396.86 r270 bottom
C132 "100nF" 0805 3923.14,4577.22 r0 bottom
C133 "100nF" 0805 3617.14,4698.22 r0 bottom
C134 "100nF" 0805 3361,4445 r0 bottom
C135 "100nF" 0805 3372.22,4876.86 r270 bottom
C136 "100nF" 0805 3263.22,4876.86 r270 bottom
C137 "1nF" 0805 3175.22,4874.86 r270 bottom
D1 "PMEG6010CEH" SOD87 1880.77,5946.54 r90 bottom
D2 "PMEG6010CEH" SOD87 8318.23,5500.54 r90 top
D3 "SS34" DO214 8328.45,5007.89 r270 top locked
D4 "SS34" DO214 7373.99,5007.89 r270 top locked
D5 "PMEG6010CEH" SOD87 3458.72,3951.26 r270 top
D6 "SS34" DO214 5941,4984.06 r270 top
D7 "1N5711W-7-F" SOD87 1777.23,2512.54 r90 top
D8 "1N5711W-7-F" SOD87 1763.23,1916.54 r90 top
D9 "MA4P7102F" 1072T 3694,4445 r0 bottom
D10 "MA4P7102F" 1072T 3126,4444.78 r0 bottom
E1 "ALPS-EC12E2420404" Encoder 7486,2139.06 r90 top locked
F1 "MC12CT" 1206 8316.22,5786.14 r90 top
F2 "MC12CT" 1206 5941,5161.72 r90 top
HS1 "RD16HHF1x2" TO-220_5_DUAL_HS 2576.82,2649.72 r180 bottom locked
J1RF "1373866" 1373866 6364.17,6206.27 r180 top locked
J2 "Mic" MX-387GL_new1 1016.2,5454.72 r270 bottom locked
J3RF "1373866" 1373866 2098.07,6408.66 r0 top locked
J4 "Phones" KLBR4 1011.61,5023.62 r270 bottom locked
J5 "Line Out" MX-387GL_new1 1011.2,5887.8 r270 bottom locked
J6 "Line In" MX-387GL_new1 1010.24,6320.87 r270 bottom locked
J7 "Paddles" MX-387GL_NEW1 1010.61,4390.94 r270 bottom locked
J8 "ACC" MX-387GL_NEW1 1010.61,3955.91 r270 bottom locked
J9 "1373826" 1373826 7298,1457 r180 bottom locked
J10 "219320-0001" MOLX_USB 8690,6062.2 r90 top locked
J11 "ANT1" CON-SMA-RA 1161,1987.4 r90 bottom locked
J12 "ANT2" CON-SMA-RA 1161,3011.02 r90 bottom locked
J13 "1373826" 1373826 4633,1457 r0 bottom locked
K1 "G6KU-2FY 3DC" Omron_2FY-Pro 5757,2155 r270 top locked
K2 "G6KU-2FY 3DC" Omron_2FY-Pro 5798,2638 r270 top locked
K3 "G6KU-2FY 3DC" Omron_2FY-Pro 6626,2609 r270 top
K4 "G6KU-2FY 3DC" Omron_2FY-Pro 6632.61,1399.98 r270 top locked
L1 "2.2uH" 0805 3543.42,5427.14 r270 top
L2 "1uH" 0805 3560.14,5913.14 r90 top
L3 "0.47uH" 0805 3559.14,6190.14 r90 top
L4 "0.33uH" 0805 3551.42,5717.14 r270 top
L5 "4.7uH" 0805 3993.42,5427.14 r270 top
L6 "2.2uH" 0805 4010.14,5913.14 r90 top
L7 "1uH" 0805 4009.14,6190.14 r90 top
L8 "0.68uH" 0805 4001.42,5717.14 r270 top
L9 "2.2uH" 0805 4143.42,5427.14 r270 top
L10 "1uH" 0805 4160.14,5913.14 r90 top
L11 "0.47uH" 0805 4159.14,6190.14 r90 top
L12 "0.33uH" 0805 4151.42,5717.14 r270 top
L13 "T37-2" LPF_IND 6135,1410 r180 bottom locked
L14 "T37-2" LPF_IND 5671,1411 r180 bottom locked
L15 "T37-2" LPF_IND 5191.57,1418.68 r180 bottom locked
L16 "T37-2" LPF_IND 5349,2040 r90 bottom locked
L17 "T37-2" LPF_IND 5350.98,2510 r90 bottom locked
L18 "T37-2" LPF_IND 5350.98,2971 r90 bottom locked
L19 "T37-2" LPF_IND 6107.98,2500 r0 bottom locked
L20 "T37-2" LPF_IND 6576.98,2502 r0 bottom locked
L21 "T37-2" LPF_IND 7041.98,2502 r0 bottom locked
L22 "T37-2" LPF_IND 7046.98,1939 r180 bottom locked
L23 "T37-2" LPF_IND 6582,1938 r180 bottom locked
L24 "T37-2" LPF_IND 6115.41,1937.36 r180 bottom locked
L25 "T37-2" LPF_IND 6103,3030 r0 bottom locked
L26 "T37-2" LPF_IND 6581.2,3030 r0 bottom locked
L27 "T37-2" LPF_IND 7064,3034 r0 bottom locked
L28 "47uH" 1210_IND 8398.46,4588.23 r180 top
L29 "47uH" 1210_IND 7442.82,4588.23 r180 top
M1 "0" 0805 3174.86,5429.18 r270 top
M2 "0" 0805 2862.86,6016.22 r180 top
M3 "0" 0805 4635.39,5215.48 r0 top
M4 "0" 0805 4969.78,6099.86 r270 top
M5 "0" 0805 2528.72,5839.73 r0 top
M6 "0" 0805 2528.72,5751.65 r0 top
M7 "0" 0805 4690.93,4954.67 r90 top
M8 "0" 0805 4892,4955 r90 top
M9 "0" SB_0603_10 6632,4340.75 r90 top net-tie value=1K
M10 "0" 0805 5136.22,3010.14 r90 top
M11 "0" 0805 5034.78,3004.86 r270 top
M12 "0" 0805 4921.78,1568.86 r270 top
M13 "0" 0805 7745.22,3180.14 r90 top
M14 "0" 0805 7354.69,3271.86 r270 top
M15 "0" 0805 7451.78,3271.86 r270 top
M16 "0" 0805 7548.78,3271.86 r270 top
M17 "0" 0805 7649.22,3271.86 r270 top
M18 "0" 0805 8024.86,4971.62 r180 top
M19 "0" 0805 7739.64,4971.62 r0 top
M20 "0" 0805 7861.09,3740.38 r90 top
M21 "0" 0805 6984,3734.14 r90 top
M22 "0" 0805 1993.78,3003.86 r270 top
M23 "0" 0805 2005,2512.85 r90 top
M121 "0" SB_0603_10 4988,3258.25 r90 top net-tie value=1K
P1 "Fan" MHDR1X2 2057,5999 r270 bottom
Q1 "IRLML6244TRPBF" SOT-23-Pro 1917.39,5746.66 r180 bottom
Q2 "IRLML6244TRPBF" SOT-23-Pro 5021.66,4528.39 r270 top
Q3 "IRLML6244TRPBF" SOT-23-Pro 7350,5333 r270 top
Q4 "RD16HHF1" TO-220c 4363,3123 r90 bottom locked
Q5 "RD16HHF1" TO-220c 4363,2177 r90 bottom locked
Q6 "AOD472" TO-252 6377.61,5234.47 r90 top locked
Q7 "AOD472" TO-252 6377.61,4486.94 r90 top locked
Q8 "IRLML6244TRPBF" SOT-23-Pro 3932.39,4749.66 r180 bottom
R1 "100K" 0805 3086.5,5429.18 r270 top
R2 "100K" 0805 4971.78,5909.86 r270 top
R3 "4.7K" 0805 2996.4,5429.18 r270 top
R4 "4.7K" 0805 3263.22,5337.14 r90 top
R5 "4.7K" 0805 5068,5818.14 r90 top
R6 "4.7K" 0805 5068,6008.14 r90 top
R7 "4.7K" 0805 2863.18,5840.09 r180 top
R8 "4.7K" 0805 2771.47,5751.65 r0 top
R9 "4.7K" 0805 4971.78,5404.03 r0 top
R10 "4.7K" 0805 5065.86,5308.84 r180 top
R11 "100K" 0805 2771.14,5928.07 r0 top
R12 "100K" 0805 5066.86,5215.84 r180 top
R13 "4.7k" 0805 2054.78,5748.14 r90 bottom
R14 "47K" 0805 1284.78,5213.86 r270 top
R15 "100" 0805 1344.86,5335.91 r180 top
R16 "100" 0805 1346.86,4528.96 r180 top
R17 "100" 0805 1162.14,4390.72 r0 top
R18 "100" 0805 1059.13,4182.21 r270 top
R19 "1.5k" 0805 5112.85,4325.46 r180 top
R20 "4.7K" 0805 4912.78,4426.71 r270 top
R21 "27" 1206 7731.14,1293.22 r0 bottom
R22 "27" 1206 7731.14,1423.22 r0 bottom
R23 "27" 1206 7733.14,2542.22 r0 bottom
R24 "27" 1206 7733.14,2676.22 r0 bottom
R25 "27" 1206 7733.14,2809.22 r0 bottom
R26 "27" 1206 7734.14,2942.22 r0 bottom
R27 "27" 1206 7733.14,1556.22 r0 bottom
R28 "27" 1206 7733.14,1692.22 r0 bottom
R29 "10k" 0805 8318.23,6127.08 r270 top
R30 "1k" 0805 8198.62,5893.24 r180 top
R31 "10k" 0805 7833.04,6348.85 r180 top
R32 "10k" 0805 8198.62,5982.09 r180 top
R33 "0" 0805 7739.99,6260.22 r0 top
R34 "1k" 0805 8198.62,6070.27 r180 top
R35 "1k" 0805 8018.86,4303.73 r180 top
R36 "3.3k" 0805 7927.14,4397.78 r0 top
R37 "1k" 0805 7117.53,4303.73 r180 top
R38 "5.6k" 0805 7025.49,4397.78 r0 top
R39 "1K" 0805 7114.14,5331.78 r0 top
R40 "4.7K" 0805 7206.18,5150.41 r180 top
R41 "4.7K" 0805 7739.64,5060.86 r0 top
R42 "1K" 0805 3703.22,3342.14 r90 top
R43 "1K" 0805 3521.22,3346 r90 top
R44 "1K" 0805 3393.22,3256 r90 top
R45 "100" 0805 3279.86,3555.22 r180 top
R46 "100" 0805 2986.14,3554.78 r0 top
R47 "1K" 0805 2882,3256 r90 top
R48 "4.7" 0805 3239.22,2955.14 r90 top
R49 "4.7" 0805 3039,2956 r90 top
R50 "220" 0805 4512.78,3353.86 r270 top
R51 "220" 0805 4502.78,1836.86 r270 top
R52 "750" 0805 3880.14,3164.78 r0 top
R53 "750" 0805 3868.14,2107.78 r0 top
R54 "10" 0805 4756.14,3109.78 r0 top
R55 "2.2k" 0805 3164.29,1622.78 r0 top
R56 "2.2k" 0805 3165.14,2065.78 r0 top
R57 "1K" 0805 4001,1340.32 r180 top
R58 "1K" 0805 4001.86,1796.54 r180 top
R60 "15K" 0805 2123.47,5999 r90 top
R61 "10K" 0805 4308.22,2682.86 r270 bottom locked
R62 "100" 0805 5504.4,3966.14 r90 top
R63 "100" 0805 8029.99,3455.78 r0 top
R64 "100" 0805 7217.14,3455.78 r0 top
R65 "100" 0805 6409.14,3455.28 r0 top
R66 "100" 0805 6024.09,3455.51 r180 top
R67 "100" 0805 4688.14,3597.78 r0 top
R68 "0.001" 2512 4934.22,3595.94 r90 top
R69 "100" 0805 5592.86,3826.22 r180 top
R70 "4.7k" 0805 6094.26,4718.44 r90 top
R71 "100" 0805 6083.52,4550.11 r180 top
R72 "4.7k" 0805 5991.48,4264.78 r0 top
R73 "4.7k" 0805 6632.22,4133.14 r90 top
R74 "100" 0805 5607,4539.1 r180 top
R75 "100" 0805 5607,4627.93 r180 top
R76 "100" 0805 5607,4718.44 r180 top
R77 "5.6k" 0805 6682.22,3966.22 r180 top
R78 "1k" 0805 6494.03,3966.22 r180 top
R79 "47" 0805 1901.78,2603.86 r270 top
R80 "2.2k" 0805 1868.86,2792.22 r180 top
R81 "47" 0805 1625.22,1918.14 r90 top
R82 "2.2k" 0805 1901.78,2063.86 r270 top
R83 "1k" 0805 4119.14,4876.22 r0 bottom
R84 "2.2k" 0805 4210.86,4488.78 r180 bottom
R85 "4.7k" 0805 4210.86,4576.78 r180 bottom
R86 "10k" 0805 4119.14,4784.22 r0 bottom
RFC1 "47uH" BIG_IND 7881,5411 r270 top
RFC2 "47uH" 1210_IND 7963.77,4098.46 r270 top
RFC3 "47uH" 1210_IND 7079.56,4098.46 r270 top
RFC4 "BN43-2402 2T choke" F_Bead_Flat 3787.93,3735.18 r180 top locked
RFC5 "BN43-2402 2T choke" F_BEAD 4797.79,3191 r180 bottom locked
RFC6 "47uH" 0805 3909.14,1429.1 r0 top
RFC7 "47uH" 0805 3909.14,1708.1 r0 top
RFC8 "47uH" 0805 1867.86,3003.22 r180 top
RFC9 "47uH" 0805 2004.78,2269.86 r270 top
RFC10 "47uH" 0805 3925.14,4489.22 r0 bottom
RFC11 "47uH" 0805 3515.22,4697.86 r270 bottom
RFC12 "47uH" 0805 3281.14,4611.22 r0 bottom
T1 "CX2074NL" SOP5_NEW1 2656,3728 r90 top locked
T2 "CX2074NL" SOP5_NEW1 3139,2682 r0 top locked
T3 "1:3 BN-43-3312" PA_OUT_TRM 4309.82,2646.17 r0 top locked
T4 "FT50-43 10:1 ratio" "SWR_TR _new" 1349.48,1518.85 r90 top locked
T5 "FT50-43 10:1 ratio" "SWR_TR _new" 1351.48,2512.85 r90 top locked
TF1 "Turbine Fan 5V" TFAN 3622.05,5813 r180 bottom locked
U1 "SN74CBT3253C" SO-16 3273,5665 r180 top locked
U2 "SN74CBT3253C" SO-16 4856.78,5610.14 r180 top locked
U3 "74HCT02" SO-14 4494,4653 r0 top
U4 "LTV-816S" SMDIP-4_new1 4916,4140 r180 top
U5 "SN74LS145D" SO-16 7326,2611.83 r90 top
U6 "CH224K" CH224K 8080,6250 r0 top locked
U7 "LM2596S" TO-263-5 8301.62,4022.06 r90 top locked
U8 "LM2596S" TO-263-5 7409.13,4022.06 r90 top locked
U9 "OPA2674" SO-14-PRO 3289,3406 r270 top
U10 "LM2931CDG" SO-8-PRO 3529,1623 r270 top
U11 "LM2931CDG" SO-8-PRO 3529,2066 r270 top
U12 "BQ40Z80RSMR" QFN40P400X400X100-33N-D 5858.47,3912.7 r90 top locked

## Footprints (in the part's own frame and the unit in brackets; to place one, negate y for a bottom-side part, rotate by r counter-clockwise, add the part's x,y. Pads: shape width x height; smd on the part's side, far side on the other; paste and mask are expansions set on the pad)
0805 [mil]
  rect 55x45 smd: 1(0.86,0.22) 2(90.86,0.22)
  silkscreen extent -40,-35 132,36
1072T [mm] "1072 MELF package"
  rect 1.7x3.2 smd: 1(-1.7,0) 2(1.7,0)
  silkscreen extent -2.7,-2.25 2.7,1.75
1206 [mil]
  rect 60x60 smd: 1(0.86,0.22) 2(135.86,0.22)
  silkscreen extent -49,-50 186,50
1206_Elec_Cap [mil]
  rect 60x60 smd: 1(0.86,0.22) 2(135.86,0.22)
  silkscreen extent -70,-70 186,50
1210_IND [mil] "power inductor large"
  rect 50x70 smd: 1(0.46,0.23) 2(145.46,0.23)
  silkscreen extent -43,-69 190,69
2512 [mm]
  rect 2x3.81 smd: 1(0.022,0.006) 2(6.25,0.006)
  silkscreen extent -1.25,-2.25 7.5,2.25
1373826 [mm]
  rect 0.8x1.1 smd: A1(-1.27,2.75) A2(0,2.75) A3(1.27,2.75) B1(-1.27,-2.75) B2(0,-2.75) B3(1.27,-2.75)
  round 0.8 hole 1.6 unplated: MH1(-3.48,0) MH2(3.48,0)
  rect 1.2x2.75 smd: MP1(-3.78,2.425) MP2(-3.78,-2.425) MP3(3.78,-2.425) MP4(3.78,2.425)
  silkscreen extent -2.8,-2.1 2.8,3.7
1373866 [mm]
  rect 0.8x1.1 smd: A1(-5.715,2.75) A2(-4.445,2.75) A3(-3.175,2.75) A4(-1.905,2.75) A5(-0.635,2.75) A6(0.635,2.75) A7(1.905,2.75) A8(3.175,2.75) A9(4.445,2.75) A10(5.715,2.75) A11(-5.715,-2.75) A12(-4.445,-2.75) A13(-3.175,-2.75) A14(-1.905,-2.75) A15(-0.635,-2.75) A16(0.635,-2.75) A17(1.905,-2.75) A18(3.175,-2.75) A19(4.445,-2.75) A20(5.715,-2.75)
  round 0.8 hole 1.6 unplated: MH1(-7.925,0) MH2(7.925,0)
  rect 1.2x2.75 smd: MP1(-8.225,2.425) MP2(8.225,2.425) MP3(-8.225,-2.425) MP4(8.225,-2.425)
  silkscreen extent -7.2,-2.1 7.2,4.1
BATT_HOLDER_5S [mm] "21700 Battery Holder"
  round 3.75 hole 2.5: 1(-28.5,36) 2(-28.5,-41) 3(-8,36) 4(-8,-41) 5(12.5,36) 6(12.5,-41) 7(35.5,36) 8(35.5,-41) 9(56,36.25) 10(56,-41)
  rect 1.27x1.524 smd: 11(12.507,1.131) 12(12.507,-1.155)
  silkscreen extent -39.67,-43.75 67.17,38.75
BIG_IND [mm] "power inductor large"
  rect 3x6 smd: 1(-5.5,0.006) 2(5.5,0)
  silkscreen extent -6.25,-6.25 6.25,6.25
CAP_ALUM_Pro [mm]
  rect 3x1 smd: 1(-3,0) 2(3,0)
  silkscreen extent -4.32,-3.3 3.33,3.3
CH224K [mm] "unknown"
  rect 2.3x3.2 smd: 0(0,0)
  oval 1.65x0.5 smd: 1(-3,-2) 2(-3,-1) 3(-3,0) 4(-3,1) 5(-3,2) 6(3,2) 7(3,1) 8(3,0) 9(3,-1) 10(3,-2)
  silkscreen extent -2.12,-3.12 1.75,2.5
CON-SMA-RA [mil] "Connector, SMA Female, 5-Lead, Thru-Hole, Right-Angle, Body 7x7mm"
  round 100 hole 60: 1(0,0) 2(-100,-100) 2(-100,100) 2(100,-100) 2(100,100)
  silkscreen extent -146,-146 146,146
DO214 [mm]
  rect 1.96x3.39 smd: 1(0.012,0.006) 2(6.25,0)
  silkscreen extent -1.5,-2.25 7.85,2.25
Encoder [mil] "Alps Rotary Encoder"
  oval 110.24x130 hole 85: 1(-246.06,0) 2(246.06,0)
  round 62 hole 40: A(-98.43,-295.28) B(98.43,-295.28) C(0,-295.28)
  silkscreen extent -245,-260 247,260
F_BEAD [mil] "Ferrite bead choke, 1t, BN43-2402"
  rect 62x62 hole 40: 1(-49.21,0)
  round 62 hole 40: 2(50.79,0)
  silkscreen extent -148,-98 148,98
F_Bead_Flat [mil] "Ferrite bead choke, 1t, BN43-2402"
  round 62 hole 40: 1(50.79,0)
  rect 62x62 hole 40: 2(-49.21,0)
  silkscreen extent -157,-394 157,49
KLBR4 [mm] "Lumberg KLBR4 phones receptacle"
  round 2.54 hole 1.8: B(-2.2,-9.5) S(-2.2,-2.2)
  round 2 hole 1.27: R(-4.5,-11.8) T(4.5,-10.5)
  silkscreen extent -5.73,-12.09 6,0
LPF_IND [mm] "T37-2 inductor"
  round 1.5 hole 0.9: 1(-2.5,3.75) 2(2.5,3.75)
  silkscreen extent -5.5,-5.5 5.5,5.5
MHDR1X2 [mm] "Connector; Header; 2 Position"
  rect 1x1 hole 0.6: 1(0,0)
  round 1 hole 0.6: 2(1.27,0)
  silkscreen extent -0.9,-0.9 2.17,0.9
MOLX_USB [mm]
  rect 0.3x0.85 smd: A1(3.384,0.749) A4(2.549,0.751) A5(1.25,0.75) A6(0.25,0.75) A7(-0.25,0.75) A8(-1.25,0.75) A9(-2.547,0.75) A12(-3.378,0.75) B1(-3.077,0.751) B4(-2.25,0.75) B5(-1.75,0.75) B6(-0.75,0.75) B7(0.75,0.75) B8(1.75,0.75) B9(2.25,0.75) B12(3.079,0.749)
  round 1.4 hole 1: MH3(-5.75,0) MH4(5.75,0)
  round 1.5 hole 1.25: MH5(5.75,-3.5) MH6(-5.75,-3.5)
  Keep-Out Layer board cut-out: 4.5,-4.676 4.5,-0.087 -4.5,-0.087 -4.5,-4.676
  Keep-Out Layer lines w0.127: -4.5,-0.107 4.5,-0.107 4.5,-4.676 -4.5,-4.676 -4.5,-0.107
  silkscreen extent -6.69,-4 6.71,1.31
MX-387GL_new1 [mm] "Pro Signal 3pin receptacle"
  round 1.6 hole 1.6 unplated: 0(0,-8.9) 0(0,-1.74)
  round 2 hole 1.27: R(3,-11.5) S(-3,-11.5) T(-3.5,-3.5) T(3.5,-3.5)
  silkscreen extent -4.75,-12.75 4.75,0
MX-387GL_NEW1 [mm] "Pro Signal 3pin receptacle"
  round 1.6 hole 1.6 unplated: 0(0,-8.9) 0(0,-1.74)
  round 2 hole 1.27: R(3,-11.5) S(-3,-11.5) T(-3.5,-3.5) T(3.5,-3.5)
  silkscreen extent -4.75,-12.75 4.75,0
Omron_2FY-Pro [mm] "Omron SMD relay"
  rect 2.4x0.9 smd: 1(-3.2,3.8) 2(-3.2,0.6) 3(-3.2,-1.6) 4(-3.2,-3.8) 5(3.2,-3.8) 6(3.2,-1.6) 7(3.2,0.6) 8(3.2,3.8)
  silkscreen extent -4.8,-5.4 4.8,5.4
PA_OUT_TRM [mm] "transformer 1:3, 5 pin, BN43-3312"
  rect 3.5x3.5 hole 2: 1(-14,4.5)
  round 3.5 hole 2: 2(14,0) 3(-14,-4.5) 4(14,4.5) 5(14,-4.5)
  silkscreen extent -16.25,-10 16.25,10
QFN40P400X400X100-33N-D [mm]
  rect 0.8x0.2 smd: 1(-2.095,1.4) 2(-2.098,1) 3(-2.095,0.6) 4(-2.098,0.2) 5(-2.098,-0.2) 6(-2.098,-0.6) 7(-2.098,-1) 8(-2.098,-1.4) 17(2.159,-1.4) 18(2.159,-1) 19(2.159,-0.6) 20(2.159,-0.2) 21(2.159,0.2) 22(2.159,0.6) 23(2.159,1) 24(2.159,1.4)
  rect 0.2x0.8 smd: 9(-1.4,-2.159) 10(-1,-2.159) 11(-0.6,-2.159) 12(-0.2,-2.159) 13(0.2,-2.159) 14(0.6,-2.159) 15(1,-2.159) 16(1.4,-2.159) 25(1.4,2.159) 26(1,2.159) 27(0.6,2.159) 28(0.2,2.159) 29(-0.2,2.159) 30(-0.6,2.159) 31(-1,2.159) 32(-1.4,2.159)
  rect 1.45x1.45 smd: 33(0,0)
  silkscreen extent -2.47,1.9 -2.28,2.1, body extent -2.05,-2.05 2.05,2.05, height 1
SB_0603_10 [mil] "Jumper"
  rect 32x40 smd: 1(33.75,0) 2(-33.75,0)
  Top Layer region: -26.25,0 -16.25,0 3.75,-20 -26.25,-20
  Top Layer region: -26.25,0 -16.25,0 3.75,20 -26.25,20
  Top Layer region: 23.75,20 13.75,20 -6.25,0 13.75,-20 23.75,-20
  Top Layer lines w10: -33.75,0 33.75,0
SMDIP-4_new1 [mm] "4 pin SMD DIP, pitch 2.54mm"
  oval 2x1.5 smd: 1(-5,1.27) 2(-5,-1.27) 3(5,-1.27) 4(5,1.27)
  silkscreen extent -6.15,-3 6.15,3
SO-8-PRO [mil]
  oval 80x24 smd: 1(0,0) 2(0,-50) 3(0,-100) 4(0,-150) 5(220,-150) 6(220,-100) 7(220,-50) 8(220,0)
  silkscreen extent 60,-179 160,35
SO-14 [mil]
  oval 80x24 smd: 1(0,0) 2(0,-50) 3(0,-100) 4(0,-150) 5(0,-200) 6(0,-250) 7(0,-300) 8(220,-300) 9(220,-250) 10(220,-200) 11(220,-150) 12(220,-100) 13(220,-50) 14(220,0)
  silkscreen extent 59,-335 161,38
SO-14-PRO [mil]
  oval 80x24 smd: 1(0,0) 2(0,-50) 3(0,-100) 4(0,-150) 5(0,-200) 6(0,-250) 7(0,-300) 8(220,-300) 9(220,-250) 10(220,-200) 11(220,-150) 12(220,-100) 13(220,-50) 14(220,0)
  silkscreen extent 59,-335 161,38
SO-16 [mil]
  oval 80x24 smd: 1(0,0) 2(0,-50) 3(0,-100) 4(0,-150) 5(0,-200) 6(0,-250) 7(0,-300) 8(0,-350) 9(220,-350) 10(220,-300) 11(220,-250) 12(220,-200) 13(220,-150) 14(220,-100) 15(220,-50) 16(220,0)
  silkscreen extent 59,-385 160,40
SOD87 [mil]
  rect 50x70 smd: 1(0.46,0.23) 2(145.46,0.23)
  silkscreen extent -45,-55 201,55
SOP5_NEW1 [mm] "Small Outline; 6 Leads (1 Absent); Body Width 6.9 mm; Pitch 2 mm"
  rect 0.8x1.4 smd: 1(-2,-2.9) 2(0,-2.9) 3(2,-2.9) 4(2,2.9) 6(-2,2.9)
  silkscreen extent -3.87,-1.75 3,1.75
SOT-23-Pro [mil]
  rect 36x36 smd: 1(0.39,0.34) 2(75.39,0.34)
  rect 36x50 smd: 3(38.39,80.34)
  silkscreen extent -75,-40 150,125
"SWR_TR _new" [mm] "FT50-43 10:1 transformer"
  round 1.5 hole 0.9: 1(-5,4) 2(5,4)
  round 2 hole 1.5: 3(0,6.5) 4(0,0) 5(0,-2.25)
  silkscreen extent -8,-8 8,8
TFAN [mm] "Turbo Fan 5V"
  round 3 hole 2.8 unplated: 1(-17,17.25) 2(17,17) 3(17,-17)
  silkscreen extent -20,-20 20,20
TO-220_5_DUAL_HS [mm] "Dual MOSFET and heatsink"
  round 3 hole 2.5 unplated: 1(-39.4,19.5)
  round 3 hole 2.8 unplated: 2(-39.4,-19.5)
  silkscreen extent -42.5,-38 26,38
TO-220c [mm] "TO, Thru-Hole, Vertical, Heatsink Mounted; 3 In-Line Leads; Pitch 2.54 mm"
  rect 1.6x1.6 hole 1: 1(-2.54,0)
  round 1.6 hole 1: 2(0,0) 3(2.54,0)
  silkscreen extent -4,-1.25 3.75,1.25
TO-252 [mm] "Plastic flagne mount package"
  rect 3.2x1 smd: 1(-5.6,2.2) 3(-5.6,-2.2)
  rect 6.2x5.4 smd: 2(1.5,0)
  silkscreen extent -7.6,-3.85 4.8,3.85
TO-263-5 [mil]
  rect 118.11x42 smd: 1(251,-133.46) 2(251,-66.46) 3(251,0) 4(251,67.54) 5(251,134.54)
  rect 354.33x401.57 smd: 3(-137.8,0)
  silkscreen extent -335,-217 315,217